# EAGLE board board-schematic (EAGLE 7.6.0)

Size 56.82 x 53.33 mm. Coordinates in mm from the lower left corner, seen from the top.
Outline: 0,0 56.82,0 56.82,53.33 0,53.33 0,0
Copper layers (1*16): Top 0.035mm / dielectric 1.5mm / Bottom 0.035mm
Design rules "default": minimum track width 10mil, minimum drill 24mil, track to track 8mil, track to pad 8mil, pad to pad 8mil, via to via 8mil, smd to smd 8mil, copper to edge 40mil, drill to drill 8mil, minimum pad ring 10mil, minimum via ring 8mil, stop-mask expansion 4mil, vias tented up to drill 0mil, thermal gap 10mil

## Footprints (pad centres in the part's own frame; a part is rotated, then mirrored left to right if it is on the bottom)
0207/10 = drill 0.813 octagon: 1 -5.08,0; 2 5.08,0
TL1105 = drill 1 pad 1.676: 1 -2.25,3.25; 2 2.25,3.25; 3 -2.25,-3.25; 4 2.25,-3.25
ARDUINO_MICRO = drill 1.016 pad 1.575: 3V3 6.35,1.27; +5V 31.75,1.27; A0 11.43,1.27; A1 13.97,1.27; A2 16.51,1.27; A3 19.05,1.27; A4 21.59,1.27; A5 24.13,1.27; D2 29.21,16.51; D3 26.67,16.51; D4 24.13,16.51; D5 21.59,16.51; D6 19.05,16.51; D7 16.51,16.51; D8 13.97,16.51; D9 11.43,16.51; D10 8.89,16.51; D11 6.35,16.51; D12 3.81,16.51; D13 3.81,1.27; GND 31.75,16.51; GND. 36.83,1.27; MISO] 41.91,1.27; MOSI 44.45,16.51; NC 26.67,1.27; NC. 29.21,1.27; REF 8.89,1.27; RST 34.29,16.51; RST. 34.29,1.27; RX1 36.83,16.51; SCK 44.45,1.27; SS 41.91,16.51; TX1 39.37,16.51; VIN 39.37,1.27 | hole 1.2: 1.27,1.27; 1.27,16.51; 46.99,16.51; 46.99,1.27

## Placement (x,y rotation side)
R1  10k‎Ω  [0207/10]  5,22.78 0 top
S1  [TL1105]  5,35.48 0 top
U1  [ARDUINO_MICRO]  5,10.08 0 top

## Library data of the parts
R1 S1 U1 = AUTODESK_CIRCUITS_BREADBOARD

## Nets
N$1: U1.A3
N$2: U1.NC
N$3: U1.D12
N$4: U1.VIN
N$5: U1.NC.
N$6: U1.RST.
N$7: U1.D7
N$8: U1.D9
N$9: U1.A5
N$10: U1.MOSI
N$11: U1.GND
N$12: U1.D5
N$13: U1.REF
N$14: S1.3 U1.+5V
N$15: U1.SCK
N$16: U1.TX1
N$17: U1.A0
N$18: U1.A2
N$19: U1.D2
N$20: R1.2 S1.1 U1.D6
N$21: U1.A4
N$22: U1.MISO]
N$23: U1.RX1
N$24: U1.3V3
N$25: U1.D3
N$26: U1.RST
N$27: U1.D11
N$28: U1.SS
N$29: U1.D4
N$30: U1.D8
N$31: U1.D10
N$32: U1.A1
N$33: R1.1 U1.GND.
N$34: S1.4
N$35: S1.2
N$36: U1.D13

## Tracks (layer width: path | path; a pad name or v marks a point on that pad's centre or on a via)
N$14  (1 unrouted)
N$20  (2 unrouted)
N$33  (1 unrouted)